# Altium PCB btretro_pcb.PcbDoc (part 1 of 2)
Units mm, origin at the board's own origin, x right, y up, seen from the top; angles counter-clockwise.
Board outline 100 x 100 mm, 2 copper layers (Top Layer, Bottom Layer); 79 components, 68 nets, 387 pads, 70 vias.
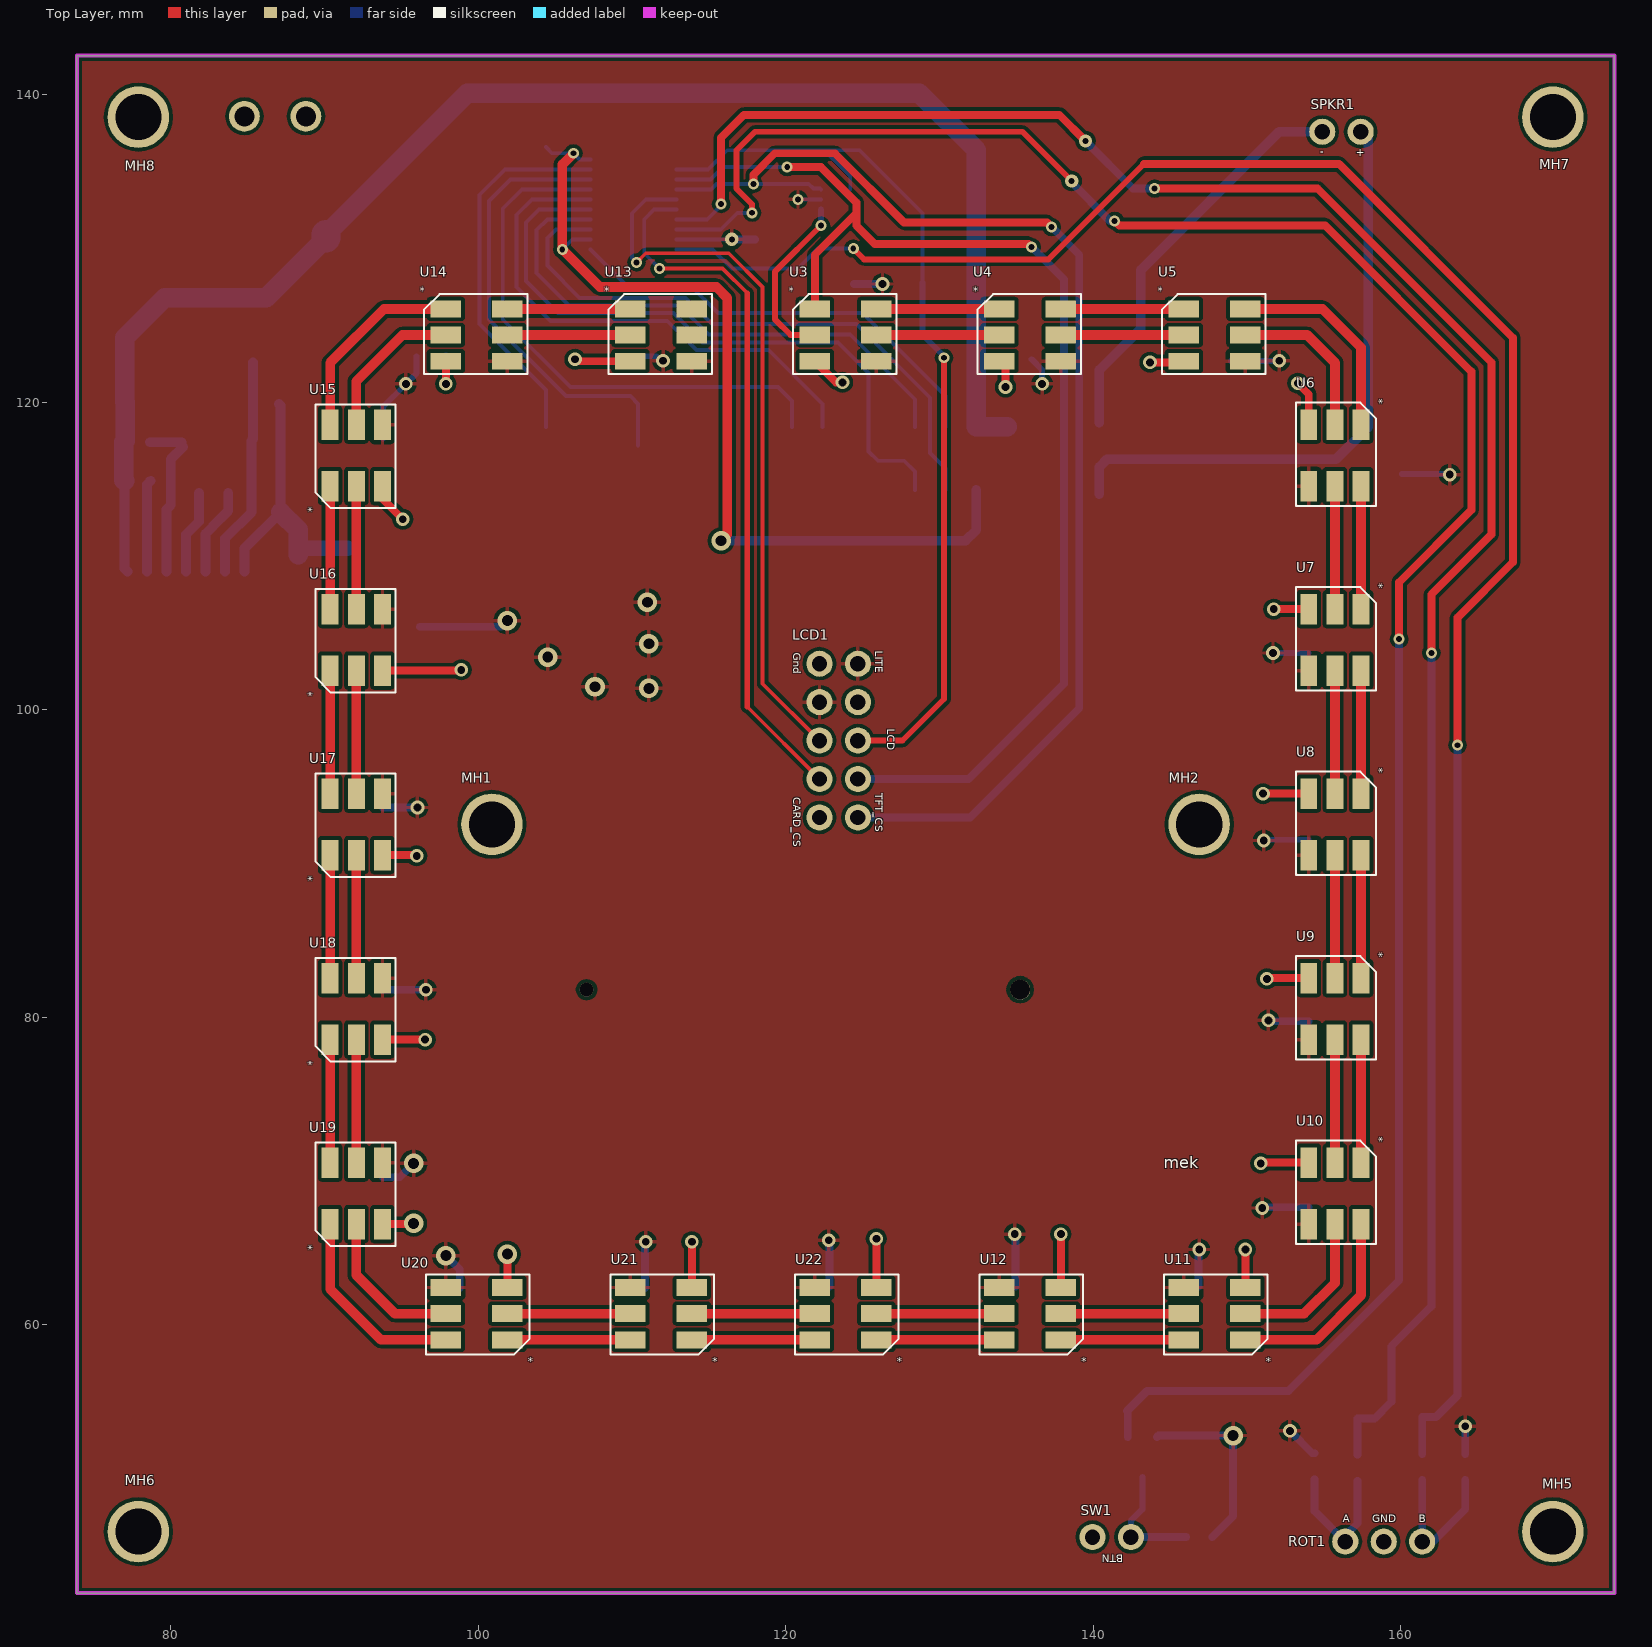
[diagram p0: Top Layer view]
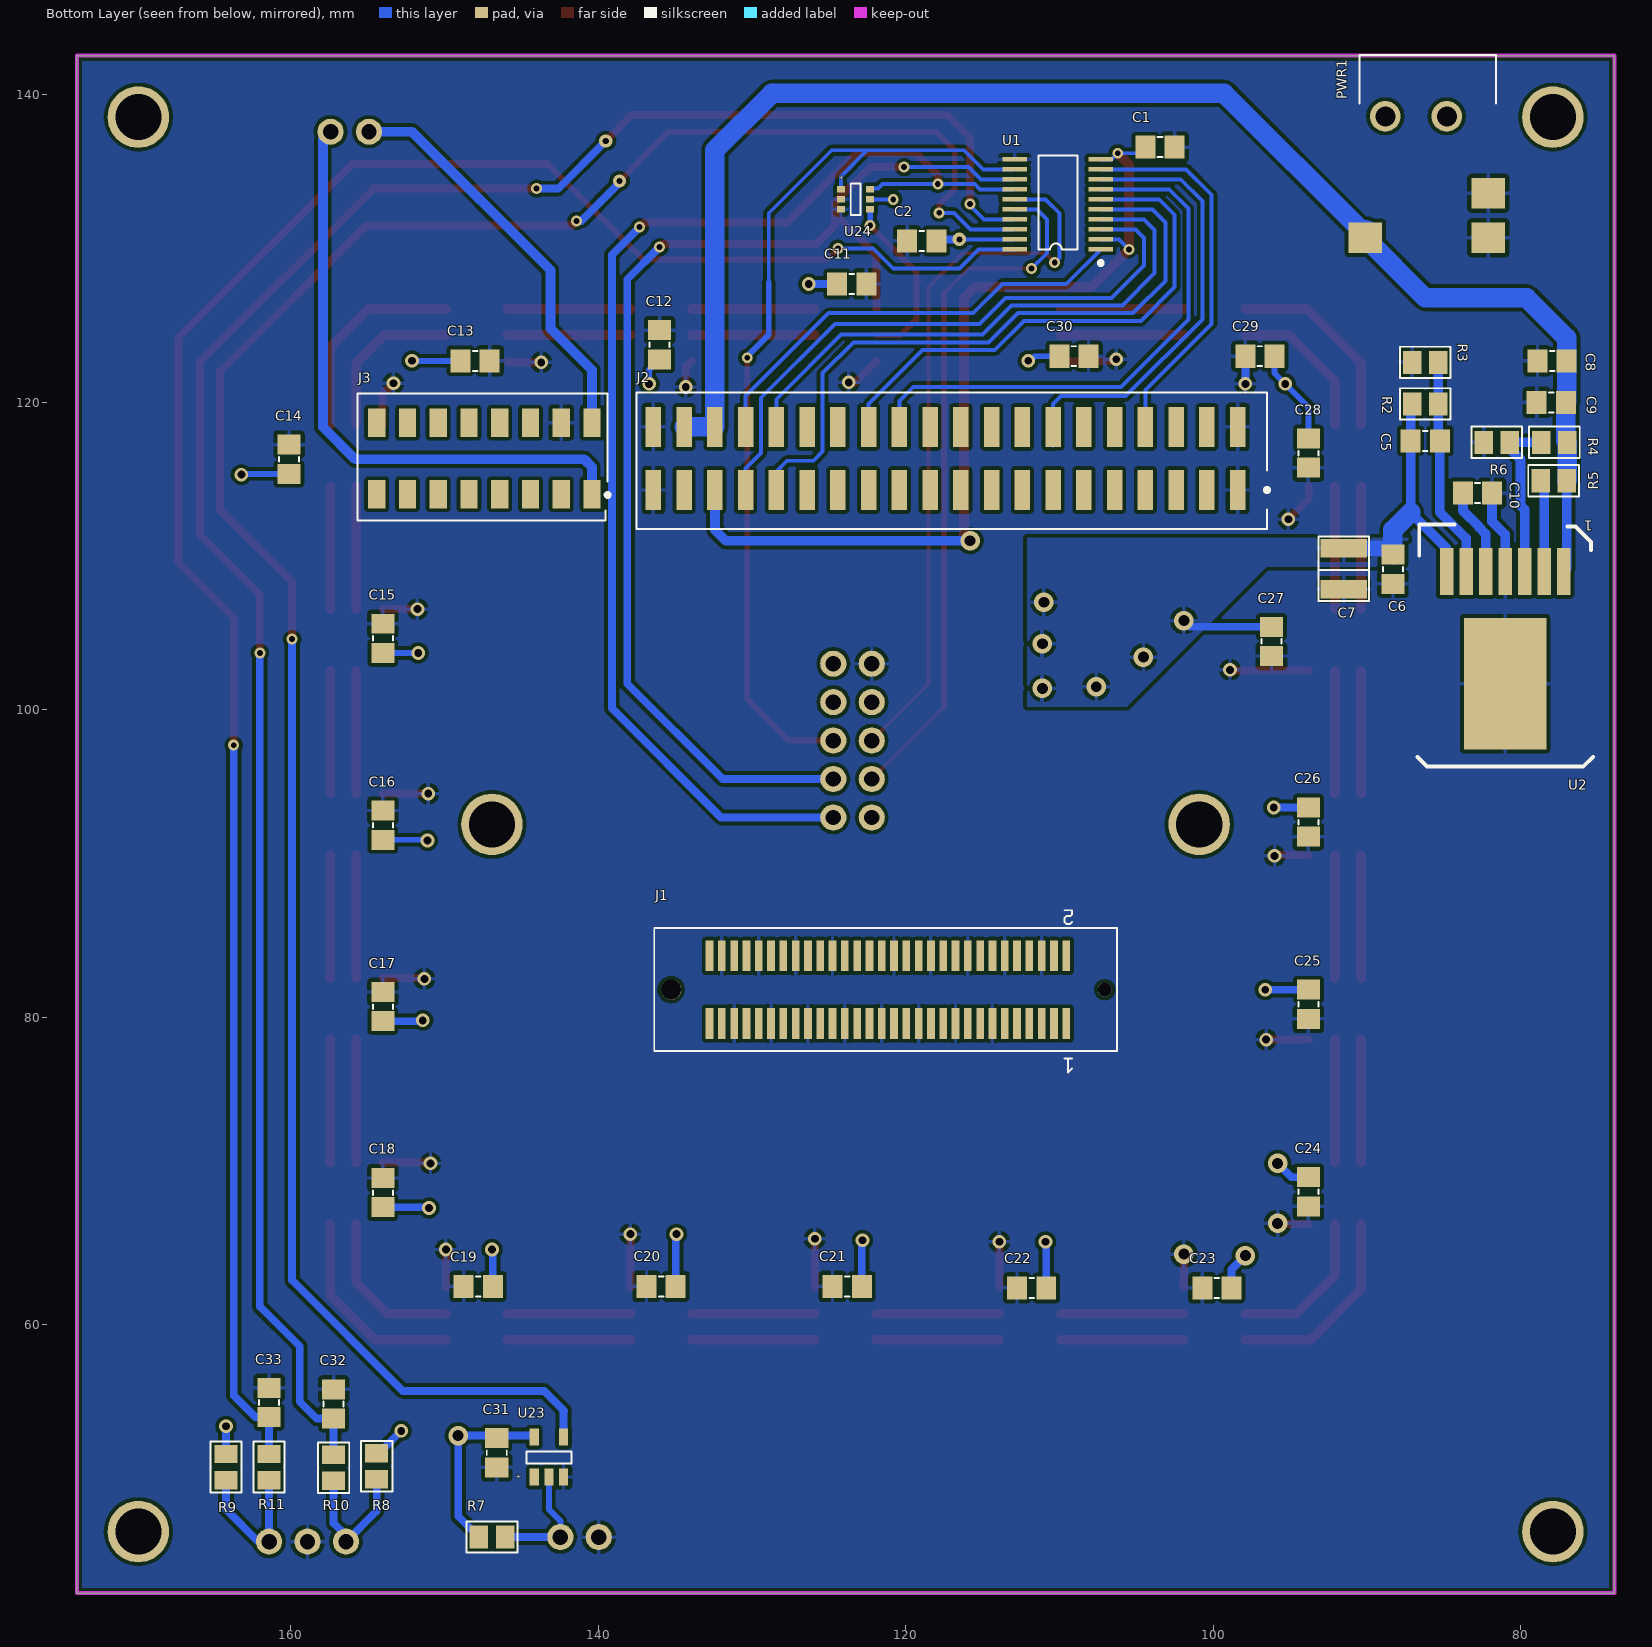
[diagram p1: Bottom Layer view, seen from below]

## Layer stack, top to bottom
Top Solder: solder mask 0.0102, Solder Resist, Dk 3.5
Top Layer: signal copper 0.0356
Dielectric 1: dielectric 0.32, FR-4, Dk 4.8
Bottom Layer: signal copper 0.0356
Bottom Solder: solder mask 0.0102, Solder Resist, Dk 3.5

## Board outline
73.9,42.55 73.9,142.55 173.9,142.55 173.9,42.55

## Design rules (kind name [scope] priority, off if disabled: settings)
Clearance [All] p1: gap=0.229 ignorepadtopadclearanceinfootprint=FALSE except(0: Arc-Hole Track-Hole)
HoleSize [All] p1: absolutevalues=TRUE maxlimit=4 minlimit=0.025 maxpercent=80.000 minpercent=20.000
MinimumAnnularRing [All] p1: minimumring=0.152
MinimumSolderMaskSliver [All] p1 off: minsoldermaskwidth=0.254
PolygonConnect [All] p1: connectstyle=Relief reliefconductorwidth=0.254 reliefentries=4 polygonreliefangle="90 Angle" airgapwidth=0.254
RoutingVias [All] p1: holewidth=0.711 width=1.27 viastyle="Through Hole" minholewidth=0.254 minwidth=0.254 maxholewidth=1.27 maxwidth=2.54
SilkToSolderMaskClearance [IsPad] p1 off: minsilkscreentomaskgap=0.051 clearancetoexposedcopper=TRUE
SolderMaskExpansion [All] p1: expansion=0.102
Width [All] p1: maxlimit=2.54 minlimit=0.127 preferedwidth=0.254
27 further rules are at their usual default settings.

## Components (designator, comment, footprint, x,y, rotation, side; value= is the part's Value field where it differs from the comment)
C1 "CAP_0805_.1u_250V" CAPC2012X135N 103.45,136.6 r180 bottom value=.1uF
C2 "CAP_0805_.1u_250V" CAPC2012X135N 118.95,130.5 r180 bottom value=.1uF
C5 "CAP_0805_m22n" CAPC2012X135N 86.2,117.5 r0 bottom value=22nF
C6 "CAP_0805_10u_16V" CAPC2012X135N 88.3,109.15 r90 bottom value=10uF
C7 "CAP_1210_100u_10V" FP_1210 91.5,107.833 r90 bottom value=100uF
C8 "CAP_0805_1u_100V" CAPC2012X135N 77.95,122.7 r180 bottom value=1uF
C9 "CAP_0805_22u_25V" CAPC2012X135N 78,120 r180 bottom value=22uF
C10 "CAP_0805_m22n" CAPC2012X135N 82.8,114.1 r0 bottom value=22nF
C11 "CAP_0805_.1u_250V" CAPC2012X135N 123.5,127.7 r0 bottom value=.1uF
C12 "CAP_0805_.1u_250V" CAPC2012X135N 136,123.75 r270 bottom value=.1uF
C13 "CAP_0805_.1u_250V" CAPC2012X135N 148,122.7 r0 bottom value=.1uF
C14 "CAP_0805_.1u_250V" CAPC2012X135N 160.1,116.3 r270 bottom value=.1uF
C15 "CAP_0805_.1u_250V" CAPC2012X135N 154,104.65 r270 bottom value=.1uF
C16 "CAP_0805_.1u_250V" CAPC2012X135N 154,92.5 r270 bottom value=.1uF
C17 "CAP_0805_.1u_250V" CAPC2012X135N 154,80.7 r270 bottom value=.1uF
C18 "CAP_0805_.1u_250V" CAPC2012X135N 154,68.6 r270 bottom value=.1uF
C19 "CAP_0805_.1u_250V" CAPC2012X135N 147.8,62.5 r180 bottom value=.1uF
C20 "CAP_0805_.1u_250V" CAPC2012X135N 135.9,62.5 r180 bottom value=.1uF
C21 "CAP_0805_.1u_250V" CAPC2012X135N 123.8,62.5 r180 bottom value=.1uF
C22 "CAP_0805_.1u_250V" CAPC2012X135N 111.8,62.4 r180 bottom value=.1uF
C23 "CAP_0805_.1u_250V" CAPC2012X135N 99.75,62.4 r180 bottom value=.1uF
C24 "CAP_0805_.1u_250V" CAPC2012X135N 93.8,68.65 r90 bottom value=.1uF
C25 "CAP_0805_.1u_250V" CAPC2012X135N 93.8,80.85 r90 bottom value=.1uF
C26 "CAP_0805_.1u_250V" CAPC2012X135N 93.8,92.7 r90 bottom value=.1uF
C27 "CAP_0805_.1u_250V" CAPC2012X135N 96.2,104.45 r90 bottom value=.1uF
C28 "CAP_0805_.1u_250V" CAPC2012X135N 93.8,116.7 r90 bottom value=.1uF
C29 "CAP_0805_.1u_250V" CAPC2012X135N 96.95,123 r180 bottom value=.1uF
C30 "CAP_0805_.1u_250V" CAPC2012X135N 109.05,123 r0 bottom value=.1uF
C31 "CAP_0805_.1u_250V" CAPC2012X135N 146.591,51.677 r90 bottom value=.1uF
C32 "CAP_0805_10n_250V" CAPC2012X135N 157.2,54.85 r270 bottom
C33 "CAP_0805_10n_250V" CAPC2012X135N 161.4,54.95 r270 bottom
J1 "DragonBoard_HIGH_SPEED" DB_HIGH_SPEED 109.55,79.6 r0 bottom locked
J2 "DragonBoard_LOW_SPEED" 57202_40_PIN_HEADER 98.4,114.3 r180 bottom locked
J3 "DragonBoard_ANALOG" 16_PIN_ANALOG_CONN 140.4,118.675 r0 bottom locked
LCD1 "Display" LCD_HOLES 124.7,98 r270 top
MH1 "MOUNTHOLES" HOLE_BTRETRO 100.9,92.55 r0 top
MH2 "MOUNTHOLES" HOLE_BTRETRO 146.9,92.55 r0 top
MH5 "MOUNTHOLES" HOLE_BTRETRO 169.9,46.55 r0 top
MH6 "MOUNTHOLES" HOLE_BTRETRO 77.9,46.55 r0 top
MH7 "MOUNTHOLES" HOLE_BTRETRO 169.9,138.55 r0 top
MH8 "MOUNTHOLES" HOLE_BTRETRO 77.9,138.55 r0 top
PWR1 "EIAJ3" "EIAJ3 BARREL" 87.3,142.6 r270 bottom
R2 "RES_5.23K" RES0805 86.2,119.9 r0 bottom
R3 "RES_0805_1K" RES0805 86.2,122.6 r0 bottom
R4 "RES_0805_23.2K" RES0805 77.8,117.4 r180 bottom
R5 "RES_0805_100K" RES0805 77.85,114.9 r0 bottom
R6 "RES_0805_11.8K" RES0805 81.55,117.4 r180 bottom
R7 "RES_0805_10K" RES0805 146.9,46.2 r0 bottom
R8 "RES_0805_10K" RES0805 154.4,50.8 r90 bottom
R9 "RES_0805_10K" RES0805 164.2,50.75 r90 bottom
R10 "RES_0805_10K" RES0805 157.2,50.7 r270 bottom
R11 "RES_0805_10K" RES0805 161.4,50.75 r270 bottom
ROT1 "ROT_ENCODER" ROTENCFP 158.9,45.9 r0 top
SPKR1 "CDS-27204-L100" SPK_BTRETRO 157.4,137.6 r180 top
SW1 "BUTTON" BUTTON 142.455,46.194 r180 top
U1 "TXS0108" TSSOP20 107.3,129.95 r0 bottom
U2 "LMZ12003" TO-PMOD-7 81,109.005 r0 bottom
U3 "APA102c" LED_APA 123.9,124.375 r0 top
U4 "APA102c" LED_APA 135.9,124.375 r0 top
U5 "APA102c" LED_APA 147.9,124.375 r0 top
U6 "APA102c" LED_APA 155.725,116.55 r270 top
U7 "APA102c" LED_APA 155.725,104.55 r270 top
U8 "APA102c" LED_APA 155.725,92.55 r270 top
U9 "APA102c" LED_APA 155.725,80.55 r270 top
U10 "APA102c" LED_APA 155.725,68.55 r270 top
U11 "APA102c" LED_APA 147.9,60.725 r180 top
U12 "APA102c" LED_APA 135.9,60.725 r180 top
U13 "APA102c" LED_APA 111.9,124.375 r0 top
U14 "APA102c" LED_APA 99.9,124.375 r0 top
U15 "APA102c" LED_APA 92.075,116.55 r90 top
U16 "APA102c" LED_APA 92.075,104.55 r90 top
U17 "APA102c" LED_APA 92.075,92.55 r90 top
U18 "APA102c" LED_APA 92.075,80.55 r90 top
U19 "APA102c" LED_APA 92.075,68.55 r90 top
U20 "APA102c" LED_APA 99.9,60.725 r180 top
U21 "APA102c" LED_APA 111.9,60.725 r180 top
U22 "APA102c" LED_APA 123.9,60.725 r180 top
U23 "SN74LVC1G17" "DBV0005A (SOT-23)" 144.15,50.1 r90 bottom
U24 "NC7SZ167" SC70 124.2,133.85 r180 bottom

## Footprints (in the part's own frame and the unit in brackets; to place one, negate y for a bottom-side part, rotate by r counter-clockwise, add the part's x,y. Pads: shape width x height; smd on the part's side, far side on the other; paste and mask are expansions set on the pad)
16_PIN_ANALOG_CONN [mm]
  rect 1.12x1.83 smd: 1(0,4.65) 2(0,0) 3(2,4.65) 4(2,0) 5(4,4.65) 6(4,0) 7(6,4.65) 8(6,0) 9(8,4.65) 10(8,0) 11(10,4.65) 12(10,0) 13(12,4.65) 14(12,0) 15(14,4.65) 16(14,0)
  silkscreen extent -1.14,-1.91 15.24,6.35
57202_40_PIN_HEADER [mm]
  rect 1x2.6 smd: 1(0,0) 2(0,4.1) 3(-2,0) 4(-2,4.1) 5(-4,0) 6(-4,4.1) 7(-6,0) 8(-6,4.1) 9(-8,0) 10(-8,4.1) 11(-10,0) 12(-10,4.1) 13(-12,0) 14(-12,4.1) 15(-14,0) 16(-14,4.1) 17(-16,0) 18(-16,4.1) 19(-18,0) 20(-18,4.1) 21(-20,0) 22(-20,4.1) 23(-22,0) 24(-22,4.1) 25(-24,0) 26(-24,4.1) 27(-26,0) 28(-26,4.1) 29(-28,0) 30(-28,4.1) 31(-30,0) 32(-30,4.1) 33(-32,0) 34(-32,4.1) 35(-34,0) 36(-34,4.1) 37(-36,0) 38(-36,4.1) 39(-38,0) 40(-38,4.1)
  silkscreen extent -39.12,-2.54 2.03,6.35
BUTTON [mm]
  round 1.7 hole 1: 1(0,0) 2(2.5,0)
CAPC2012X135N [mm]
  rect 1.3x1.5 smd: 1(-0.95,0) 2(0.95,0)
  silkscreen extent -0.15,-0.65 0.15,0.65
DB_HIGH_SPEED [mm]
  rect 0.5x2 smd: 1(0,0) 2(0,-4.4) 3(0.8,0) 4(0.8,-4.4) 5(1.6,0) 6(1.6,-4.4) 7(2.4,0) 8(2.4,-4.4) 9(3.2,0) 10(3.2,-4.4) 11(4,0) 12(4,-4.4) 13(4.8,0) 14(4.8,-4.4) 15(5.6,0) 16(5.6,-4.4) 17(6.4,0) 18(6.4,-4.4) 19(7.2,0) 20(7.2,-4.4) 21(8,0) 22(8,-4.4) 23(8.8,0) 24(8.8,-4.4) 25(9.6,0) 26(9.6,-4.4) 27(10.4,0) 28(10.4,-4.4) 29(11.2,0) 30(11.2,-4.4) 31(12,0) 32(12,-4.4) 33(12.8,0) 34(12.8,-4.4) 35(13.6,0) 36(13.6,-4.4) 37(14.4,0) 38(14.4,-4.4) 39(15.2,0) 40(15.2,-4.4) 41(16,0) 42(16,-4.4) 43(16.8,0) 44(16.8,-4.4) 45(17.6,0) 46(17.6,-4.4) 47(18.4,0) 48(18.4,-4.4) 49(19.2,0) 50(19.2,-4.4) 51(20,0) 52(20,-4.4) 53(20.8,0) 54(20.8,-4.4) 55(21.6,0) 56(21.6,-4.4) 57(22.4,0) 58(22.4,-4.4) 59(23.2,0) 60(23.2,-4.4)
  round 0.9 hole 0.9 unplated: MH1(-2.5,-2.2)
  round 1.3 hole 1.3 unplated: MH2(25.7,-2.2)
  silkscreen extent -3.3,-7.37 26.8,3.17
"DBV0005A (SOT-23)" [mm]
  rect 1.1x0.6 smd: 1(0,0) 2(0,-0.95) 3(0,-1.9) 4(2.6,-1.9) 5(2.6,0)
  silkscreen extent 0.89,-2.41 1.65,0.51
"EIAJ3 BARREL" [mm]
  rect 2x2.2 smd: 1(11.9,-2.8) 2(9,5.2) 3(11.9,5.2)
  round 2 hole 1.3 unplated: MH1(4,2.5) MH2(4,-1.5)
  silkscreen extent 0,-3.18 3.18,5.71
FP_1210 [mm]
  rect 1.2x3 smd: 1(0,0) 2(2.667,0)
  silkscreen extent -0.76,-1.65 3.43,1.65
HOLE_BTRETRO [mm]
  round 4 hole 3 unplated: MH(0,0)
LCD_HOLES [mm]
  round 1.7 hole 1: 1(-5,0) 2(-2.5,0) 3(0,0) 4(2.5,0) 5(5,0) 6(5,-2.5) 7(2.5,-2.5) 8(0,-2.5) 9(-2.5,-2.5) 10(-5,-2.5)
LED_APA [mm]
  rect 2x1.1 smd: 1(-2,1.7) 2(-2,0) 3(-2,-1.7) 4(2,-1.7) 5(2,0) 6(2,1.7)
  silkscreen extent -3.43,-2.54 3.3,2.67
RES0805 [mm]
  rect 1.2x1.5 smd: 1(-0.85,0) 2(0.85,0)
  silkscreen extent -1.65,-1.02 1.65,1.02
ROTENCFP [mm]
  round 1.7 hole 1: 1(-2.5,0) 2(0,0) 3(2.5,0)
SC70 [mm]
  rect 0.52x0.42 smd: 1(0,0) 2(0,-0.65) 3(0,-1.3) 4(1.9,-1.3) 5(1.9,-0.65) 6(1.9,0)
  silkscreen extent 0.63,-1.65 1.27,0.38
SPK_BTRETRO [mm]
  round 1.7 hole 1: 1(0,0) 2(2.5,0)
TO-PMOD-7 [mm]
  rect 0.89x3.06 smd: 1(-3.81,0) 2(-2.54,0) 3(-1.27,0) 4(0,0) 5(1.27,0) 6(2.54,0) 7(3.81,0)
  rect 5.35x8.54 smd: 8(0,7.305)
  silkscreen extent -5.71,-3.05 5.71,12.7
TSSOP20 [mm]
  rect 1.6x0.3 smd: 1(0,0) 2(0,-0.65) 3(0,-1.3) 4(0,-1.95) 5(0,-2.6) 6(0,-3.25) 7(0,-3.9) 8(0,-4.55) 9(0,-5.2) 10(0,-5.85) 11(5.6,-5.85) 12(5.6,-5.2) 13(5.6,-4.55) 14(5.6,-3.9) 15(5.6,-3.25) 16(5.6,-2.6) 17(5.6,-1.95) 18(5.6,-1.3) 19(5.6,-0.65) 20(5.6,0)
  silkscreen extent -0.13,-6.1 4.06,1.02

## Part data
C1 C2 C11 C12 C13 C14 C15 C16 C17 C18 C19 C20 C21 C22 C23 C24 C25 C26 C27 C28 C29 C30 C31: "Cap Ceramic 0.1uF 250V X7T 10% SMD 0805 125C Plastic T/R", Capacitance=100nF, Case/Package=0805, Case Code (Metric)=2012, Dielectric=X7T, Manufacturer=TDK, Manufacturer Part Number=C2012X7T2E104K125AE, Max Operating Temperature=125°C, Min Operating Temperature=-55°C, Package Quantity=1, Supplier Part Number 1=445-8883-1-ND, Tolerance=10%, Voltage Rating=250V, Case Code (Imperial)=0805, ComponentLink1Description=https://datasheet.ciiva.com/24219/c2012x7t2e104k125ae-265154-24219519.pdf, ComponentLink1URL=https://datasheet.ciiva.com/24219/c2012x7t2e104k125ae-265154-24219519.pdf, Composition=Ceramic, Depth=1.25mm, Height=1.25mm, Length=2mm, Packaging="Tape and Reel", Pricing 1="1=0.37, 10=0.25, 100=0.1419, 500=0.1002, 1000=0.0877 (USD)", REACH SVHC="No SVHC", Stock 1=30376, Supplier 1=Digi-Key, Termination=SMD/SMT, Thickness=0.049inch, Voltage Rating (DC)=250V, Weight=0.000194oz, Width=0.05inch
C5 C10: library part CAP_0805_22n_100V, "CAP CER 0.022UF 100V X7R 0805", Capacitance=22nF, Case/Package=0805, Case Code (Metric)=2012, Dielectric=X7R, Manufacturer=TDK, Manufacturer Part Number=CGJ4J2X7R2A223K125AA, Max Operating Temperature=125°C, Min Operating Temperature=-55°C, Package Quantity=1, Supplier Part Number 1=445-9184-1-ND, Tolerance=10%, Voltage Rating=100V, Case Code (Imperial)=0805, ComponentLink1Description=http://www.mouser.com/ds/2/400/lcc_highreliability_midvoltage_en-520194.pdf, ComponentLink1URL=http://www.mouser.com/ds/2/400/lcc_highreliability_midvoltage_en-520194.pdf, ComponentLink2Description=http://product.tdk.com/capacitor/mlcc/en/documents/mlccspec_highreliability_en.pdf, ComponentLink2URL=http://product.tdk.com/capacitor/mlcc/en/documents/mlccspec_highreliability_en.pdf, Composition=Ceramic, Height=1.25mm, Length=0.08inch, Packaging="Tape and Reel", Pricing 1="1=0.42, 10=0.292, 100=0.175, 500=0.1312, 1000=0.1108 (USD)", Stock 1=2508, Supplier 1=Digi-Key, Termination=SMD/SMT, Thickness=0.057inch, Voltage Rating (DC)=100V, Weight=0.000194oz, Width=0.05inch
C6: "Cap Ceramic 10uF 16V X5R 10% SMD 0805 85C T/R", Capacitance=10uF, Case/Package=0805, Case Code (Metric)=2012, Dielectric=X5R, Manufacturer="Johanson Dielectrics", Manufacturer Part Number=160R15X106KV4E, Max Operating Temperature=85°C, Min Operating Temperature=-55°C, Package Quantity=2000, Supplier Part Number 1=709-1229-1-ND, Tolerance=10%, Voltage Rating=16V, Case Code (Imperial)=0805, ComponentLink1Description=https://datasheet.ciiva.com/26948/getdatasheetpartid-132904-26948555.pdf, ComponentLink1URL=https://datasheet.ciiva.com/26948/getdatasheetpartid-132904-26948555.pdf, Depth=1.27mm, Height=1.27mm, Length=2.03mm, Mount="Surface Mount", Number of Pins=2, Packaging="Tape and Reel", Pricing 1="1=0.55, 10=0.387, 100=0.2552, 500=0.189, 1000=0.1607 (USD)", Radiation Hardening=No, REACH SVHC="No SVHC", Stock 1=36636, Supplier 1=Digi-Key, Termination=SMD/SMT, Thickness=0.06inch, Voltage Rating (DC)=16V, Weight=0.000194oz, Width=1.27mm
C7: "Cap Ceramic 100uF 10V X5R 20% SMD 1210 85C Embossed T/R", Capacitance=100uF, Case/Package=1210, Case Code (Metric)=3225, Dielectric=X5R, Dielectric Material=Ceramic, Manufacturer=Murata, Manufacturer Part Number=GRM32ER61A107ME20L, Max Operating Temperature=85°C, Min Operating Temperature=-55°C, Package Quantity=1000, Supplier Part Number 1=490-9969-1-ND, Tolerance=20%, Voltage=10V, Case Code (Imperial)=1210, ComponentLink1Description=http://components.arrow.com/part/dataview/0323_06932945, ComponentLink1URL=http://components.arrow.com/part/dataview/0323_06932945, ComponentLink2Description=http://www.mouser.com/ds/2/281/c02e-2905.pdf, ComponentLink2URL=http://www.mouser.com/ds/2/281/c02e-2905.pdf, ComponentLink3Description=http://www.farnell.com/datasheets/2079200.pdf, ComponentLink3URL=http://www.farnell.com/datasheets/2079200.pdf, ComponentLink4Description=http://psearch.en.murata.com/capacitor/product/GRM32ER61A107ME20%23.pdf, ComponentLink4URL=http://psearch.en.murata.com/capacitor/product/GRM32ER61A107ME20%23.pdf, Depth=2.5mm, Dissipation Factor=0.035%, Height=2.5mm, Lead Free="Lead Free", Length=3.2mm, Material=Ceramic, Packaging="Tape and Reel", Pricing 1="1=1.08, 10=0.822, 100=0.5882, 500=0.4554 (USD)", REACH SVHC="No SVHC", Stock 1=195702, Supplier 1=Digi-Key, Termination=SMD/SMT, Thickness=0.106inch, Voltage Rating=10V, Voltage Rating (DC)=10V, Weight=0.00388oz, Width=2.5mm
C8: "CAP CER 1UF 100V X7S 0805", Capacitance=1uF, Case/Package=0805, Case Code (Metric)=2012, Dielectric=X7S, Manufacturer=TDK, Manufacturer Part Number=C2012X7S2A105K125AE, Max Operating Temperature=125°C, Min Operating Temperature=-55°C, Package Quantity=1, Supplier Part Number 1=445-8887-1-ND, Tolerance=10%, Voltage Rating=100V, Case Code (Imperial)=0805, ComponentLink1Description=https://datasheet.ciiva.com/6252/mlcc-commercial-soft-en-6252535.pdf, ComponentLink1URL=https://datasheet.ciiva.com/6252/mlcc-commercial-soft-en-6252535.pdf, ComponentLink2Description=https://datasheet.ciiva.com/6252/mlcc-commercial-soft-en-6252538.pdf, ComponentLink2URL=https://datasheet.ciiva.com/6252/mlcc-commercial-soft-en-6252538.pdf, ComponentLink3Description=https://datasheet.ciiva.com/6252/mlcc-commercial-soft-en-6252540.pdf, ComponentLink3URL=https://datasheet.ciiva.com/6252/mlcc-commercial-soft-en-6252540.pdf, ComponentLink4Description=https://datasheet.ciiva.com/24219/c2012x7s2a105k125ae-265181-24219982.pdf, ComponentLink4URL=https://datasheet.ciiva.com/24219/c2012x7s2a105k125ae-265181-24219982.pdf, Composition=Ceramic, Depth=1.25mm, Height=1.25mm, Lead Free="Lead Free", Length=2mm, Packaging="Tape and Reel", Pricing 1="1=0.46, 10=0.327, 100=0.2152, 500=0.1594, 1000=0.1355 (USD)", Stock 1=75778, Supplier 1=Digi-Key, Termination=SMD/SMT, Thickness=0.049inch, Voltage Rating (DC)=100V, Width=0.05inch
C9: "22µF ±20% 25V X5R Ceramic Capacitor -55°C ~ 85°C Surface Mount, MLCC 0805 (2012 Metric) 0.079\" L x 0.049\" W (2.00mm x 1.25mm)", Capacitance=22uF, Case/Package=0805, Case Code (Metric)=2012, Dielectric=X5R, Manufacturer=Samsung, Manufacturer Part Number=CL21A226MAQNNNE, Max Operating Temperature=85°C, Min Operating Temperature=-55°C, Package Quantity=1, Supplier Part Number 1=1276-2908-1-ND, Tolerance=20%, Voltage Rating=25V, Case Code (Imperial)=0805, ComponentLink1Description=https://datasheet.ciiva.com/25724/cl21a226maqnnne-25724468.pdf, ComponentLink1URL=https://datasheet.ciiva.com/25724/cl21a226maqnnne-25724468.pdf, Contact Plating=Nickel,Tin, Depth=1.25mm, Length=2mm, Mount="Surface Mount", Packaging="Tape and Reel", Pricing 1="1=0.92, 10=0.678, 100=0.465, 500=0.3681, 1000=0.31 (USD)", Stock 1=536403, Supplier 1=Digi-Key, Termination=Wraparound, Thickness=0.055inch, Width=0.049inch
C32 C33: "Cap Ceramic 0.1uF 250V X7T 10% SMD 0805 125C Plastic T/R", Capacitance=10nF, Case/Package=0805, Case Code (Metric)=2012, Dielectric=X7R, Manufacturer=TDK, Manufacturer Part Number=C2012X7R2E103K125AA, Max Operating Temperature=125°C, Min Operating Temperature=-55°C, Package Quantity=1, Supplier Part Number 1=445-2280-1-ND, Tolerance=10%, Voltage Rating=250V, Case Code (Imperial)=0805, ComponentLink1Description=https://datasheet.ciiva.com/24219/c2012x7r2e103k125aa-265098-24219253.pdf, ComponentLink1URL=https://datasheet.ciiva.com/24219/c2012x7r2e103k125aa-265098-24219253.pdf, ComponentLink2Description=https://datasheet.ciiva.com/22684/1484596-22684119.pdf, ComponentLink2URL=https://datasheet.ciiva.com/22684/1484596-22684119.pdf, ComponentLink3Description=https://datasheet.ciiva.com/7975/1833281-7975113.pdf, ComponentLink3URL=https://datasheet.ciiva.com/7975/1833281-7975113.pdf, ComponentLink4Description=https://datasheet.ciiva.com/28602/1484596-28602284.pdf, ComponentLink4URL=https://datasheet.ciiva.com/28602/1484596-28602284.pdf, ComponentLink5Description=https://datasheet.ciiva.com/16427/e412-c-16427789.pdf, ComponentLink5URL=https://datasheet.ciiva.com/16427/e412-c-16427789.pdf, Composition=Ceramic, Depth=1.25mm, Height=1.25mm, Lead Free="Lead Free", Length=2mm, Mount="Surface Mount", Number of Pins=2, Packaging="Tape and Reel", Pricing 1="1=0.19, 10=0.135, 100=0.0633, 500=0.0444, 1000=0.0367 (USD)", REACH SVHC="No SVHC", Stock 1=156464, Supplier 1=Digi-Key, Termination=SMD/SMT, Thickness=0.053inch, Voltage Rating (DC)=250V, Weight=0.000194oz, Width=0.049inch
J1: "60 Position Connector Plug, Center Strip Contacts Surface Mount Gold", Case/Package=SMD/SMT, Contact Resistance=50mR, Current Rating=500mA, Flammability Rating="UL94 V-0", Manufacturer="Amphenol FCI", Manufacturer Part Number=61083-064402LF, Max Operating Temperature=125°C, Max Voltage Rating (AC)=100V, Min Operating Temperature=-40°C, Package Quantity=600, Supplier Part Number 1=609-1681-1-ND, ComponentLink1Description=https://datasheet.ciiva.com/15208/getdatasheetpartid-64898-15208309.pdf, ComponentLink1URL=https://datasheet.ciiva.com/15208/getdatasheetpartid-64898-15208309.pdf, ComponentLink2Description=https://datasheet.ciiva.com/17088/70248518-17088294.pdf, ComponentLink2URL=https://datasheet.ciiva.com/17088/70248518-17088294.pdf, ComponentLink3Description=https://datasheet.ciiva.com/394/61083-394311.pdf, ComponentLink3URL=https://datasheet.ciiva.com/394/61083-394311.pdf, ComponentLink4Description=https://datasheet.ciiva.com/5129/61083-5129495.pdf, ComponentLink4URL=https://datasheet.ciiva.com/5129/61083-5129495.pdf, ComponentLink5Description=https://datasheet.ciiva.com/10034/61083-10034439.pdf, ComponentLink5URL=https://datasheet.ciiva.com/10034/61083-10034439.pdf, ComponentLink6Description=https://datasheet.ciiva.com/394/61083-394312.pdf, ComponentLink6URL=https://datasheet.ciiva.com/394/61083-394312.pdf, ComponentLink7Description=https://datasheet.ciiva.com/394/61083-394313.pdf, ComponentLink7URL=https://datasheet.ciiva.com/394/61083-394313.pdf, Connector Type=Plug, Contact Material="Brass,Copper Alloy", Contact Plating=Nickel,Gold, Depth=6mm, Gender=Male, Housing Material=Polymer, Lead Free="Lead Free", Length=29.8mm, Mount="Surface Mount", Number of Contacts=60, Number of Positions=60, Number of Rows=2, Orientation=Straight, Packaging="Tape and Reel", Pitch=0.8mm, Pricing 1="1=6.36, 10=6.094, 25=5.5644, 50=5.2994, 100=5.0344, 250=4.5044 (USD)", Stack Height=7.7mm, Stock 1=579, Supplier 1=Digi-Key, Termination=Solder, Voltage Rating=100V, Width=6mm
J2: "40 Positions Header, Unshrouded Connector 0.079\" (2.00mm) Surface Mount Gold, GXT™", Colour=Black, Contact Resistance=25mR, Current Rating=2A, Insulation Resistance=1GR, Manufacturer="Amphenol FCI", Manufacturer Part Number=57202-G52-20LF, Max Operating Temperature=125°C, Max Voltage Rating (AC)=650V, Min Operating Temperature=-55°C, Package Quantity=100, Supplier Part Number 1=609-2632-ND, ComponentLink1Description=https://datasheet.ciiva.com/9473/57202-9473862.pdf, ComponentLink1URL=https://datasheet.ciiva.com/9473/57202-9473862.pdf, ComponentLink2Description=https://datasheet.ciiva.com/711/57202-711726.pdf, ComponentLink2URL=https://datasheet.ciiva.com/711/57202-711726.pdf, Connector Type="Male Pin", Contact Gender=Male, Contact Material="Bronze,Copper Alloy", Contact Mating Length=0.157inch, Contact Plating=Nickel,Gold,GXT, Depth=4mm, Gender=Male, Housing Colour=Black, Housing Material=Thermoplastic, Lead Free="Lead Free", Length=40mm, Mating Post Length=4mm, Mount="Surface Mount", Number of Contacts=40, Number of Positions=40, Number of Rows=2, Orientation=Straight, Packaging=Bulk, Pitch=2mm, Pricing 1="1=4.58, 10=4.395, 100=3.6624, 500=3.113, 1000=2.6552 (USD)", Radiation Hardening=No, REACH SVHC="No SVHC", Row Spacing=0.079inch, Stock 1=3189, Supplier 1=Digi-Key, Termination=Solder, Voltage Rating=650V, Width=4mm
J3: "Conn Socket Strip RCP 16 POS 2mm Solder ST SMD Tube", Case/Package=SMD/SMT, Colour=Black, Contact Resistance=25mR, Manufacturer=Molex, Manufacturer Part Number=0791091007, Max Operating Temperature=105°C, Max Voltage Rating (AC)=125V, Min Operating Temperature=-55°C, Supplier Part Number 1=WM18703-ND, ComponentLink1Description=https://datasheet.ciiva.com/10078/0791091007-pcb-receptacles-10078749.pdf, ComponentLink1URL=https://datasheet.ciiva.com/10078/0791091007-pcb-receptacles-10078749.pdf, Connector Type=Receptacle,Socket, Contact Material=Bronze, Contact Plating=Nickel,Gold, Depth=4.19mm, Gender=Female, Housing Colour=Black, Housing Material=Polymer, Length=16.19mm, Number of Contacts=16, Number of Positions=16, Number of Rows=2, Orientation=Straight, Packaging=Rail/Tube, Pitch=2mm, Pricing 1="1=2.66, 10=2.554, 100=2.1284, 500=1.8091, 1000=1.5431, 5000=1.3835 (USD)", Row Spacing=0.079inch, Stock 1=8937, Supplier 1=Digi-Key, Termination=Solder
LCD1: library part LCD_SCREEN_BTRETRO, "TFT Display"
MH1 MH2 MH5 MH6 MH7 MH8: "HOLE"
PWR1: "PJ1-021 Series 1.65 mm x 5.15 mm 16 V Right Angle SMT Power Jack", Case/Package=SMD/SMT, Colour=Black, Current Rating=5A, Flammability Rating="UL94 V-0", Insulation Resistance=100MR, Manufacturer=CUI, Manufacturer Part Number=PJ1-021-SMT-TR, Max Operating Temperature=85°C, Min Operating Temperature=-25°C, Package Quantity=500, Supplier Part Number 1=CP1-021PJCT-ND, Voltage Rating=24V, ComponentLink1Description=http://www.mouser.com/ds/2/670/pj1-021-smt-528091.pdf, ComponentLink1URL=http://www.mouser.com/ds/2/670/pj1-021-smt-528091.pdf, ComponentLink2Description=http://www.cui.com/product/resource/digikeypdf/pj1-021-smt.pdf, ComponentLink2URL=http://www.cui.com/product/resource/digikeypdf/pj1-021-smt.pdf, ComponentLink3Description=http://www.cui.com/Product/Resource/FuturePDF/PJ1-021-SMT.pdf, ComponentLink3URL=http://www.cui.com/Product/Resource/FuturePDF/PJ1-021-SMT.pdf, Connector Type=Jack, Contact Gender=Male, Contact Material=Brass, Contact Plating=Silver, Gender=Male, Housing Colour=Black, Housing Material=Thermoplastic, Lead Free="Lead Free", Mount="Surface Mount", Number of Conductors=2, Orientation=Horizontal, Packaging="Tape and Reel", Pricing 1="1=0.89, 10=0.783, 25=0.7364, 50=0.7058, 100=0.6752, 250=0.6138 (USD)", Shielding=Unshielded, Stock 1=15825, Supplier 1=Digi-Key, Termination=SMD/SMT
R2: library part RES_0805_5.23K, "Thick Film Resistors 5.23K OHM 1%", Case/Package=0805, Case Code (Metric)=2012, Manufacturer=Yageo, Manufacturer Part Number=RC0805FR-075K23L, Max Operating Temperature=155°C, Min Operating Temperature=-55°C, Power Rating=125mW, Resistance=5.23KR, Supplier Part Number 1=311-5.23KCRCT-ND, Temperature Coefficient=100ppm/°C, Tolerance=1%, Voltage Rating=150V, =5.23K, Case Code (Imperial)=0805, ComponentLink1Description=https://datasheet.ciiva.com/12577/rc0805-12577289.pdf, ComponentLink1URL=https://datasheet.ciiva.com/12577/rc0805-12577289.pdf, Composition="Thick Film", Contact Plating=Tin,Matte, Depth=1.25mm, Height=0.5mm, Lead Free="Lead Free", Length=2mm, Military Standard=Not, Packaging="Tape and Reel", Pricing 1="1=0.1, 10=0.022, 100=0.0088, 1000=0.004, 2500=0.0034 (USD)", Radiation Hardening=No, Stock 1=101854, Supplier 1=Digi-Key, Termination=SMD/SMT, Voltage Rating (DC)=150V, Weight=0.000194oz, Width=1.25mm
R3: "RES SMD 1K OHM 1% 1/8W 0805", Case/Package=0805, Case Code (Metric)=2012, Manufacturer=Yageo, Manufacturer Part Number=RC0805FR-071KL, Max Operating Temperature=155°C, Max Power Dissipation=125mW, Min Operating Temperature=-55°C, Package Quantity=1, Resistance=1KR, Supplier Part Number 1=311-1.00KCRCT-ND, Temperature Coefficient=100ppm/°C, Tolerance=1%, Voltage Rating=150V, =1K, Case Code (Imperial)=0805, ComponentLink1Description=https://datasheet.ciiva.com/2456/pyu-r-int-thick-7-2456976.pdf, ComponentLink1URL=https://datasheet.ciiva.com/2456/pyu-r-int-thick-7-2456976.pdf, ComponentLink2Description=https://datasheet.ciiva.com/2456/pyu-r-int-thick-7-2456977.pdf, ComponentLink2URL=https://datasheet.ciiva.com/2456/pyu-r-int-thick-7-2456977.pdf, ComponentLink3Description=https://datasheet.ciiva.com/11819/0900766b8106beab-11819814.pdf, ComponentLink3URL=https://datasheet.ciiva.com/11819/0900766b8106beab-11819814.pdf, ComponentLink4Description=https://datasheet.ciiva.com/7941/1686128-7941719.pdf, ComponentLink4URL=https://datasheet.ciiva.com/7941/1686128-7941719.pdf, ComponentLink5Description=https://datasheet.ciiva.com/16850/rc0805-16850409.pdf, ComponentLink5URL=https://datasheet.ciiva.com/16850/rc0805-16850409.pdf, ComponentLink6Description=https://datasheet.ciiva.com/46385/444164-46385020.pdf, ComponentLink6URL=https://datasheet.ciiva.com/46385/444164-46385020.pdf, ComponentLink7Description=https://datasheet.ciiva.com/2456/pyu-r-int-thick-7-2456975.pdf, ComponentLink7URL=https://datasheet.ciiva.com/2456/pyu-r-int-thick-7-2456975.pdf, Composition="Thick Film", Depth=1.25mm, Height=0.024inch, Lead Free="Lead Free", Length=0.079inch, Military Standard=Not, Number of Pins=2, Number of Terminations=2, Packaging="Tape and Reel", Power Rating=125mW, Pricing 1="1=0.1, 10=0.022, 100=0.0088, 1000=0.004, 2500=0.0034 (USD)", REACH SVHC=Unknown, Stock 1=6122451, Supplier 1=Digi-Key, Termination=SMD/SMT, Voltage Rating (DC)=150V, Width=0.049inch
R4: "RESISTOR, THICK FILM, 23.2KOHM, 125mW, ± 1%", Case/Package=0805, Case Code (Metric)=2012, Manufacturer="Panasonic ECG", Manufacturer Part Number=ERJ-6ENF2322V, Max Operating Temperature=155°C, Max Power Dissipation=125mW, Min Operating Temperature=-55°C, Package Quantity=1, Resistance=23.2KR, Supplier Part Number 1=P23.2KCCT-ND, Temperature Coefficient=100ppm/°C, Tolerance=1%, Voltage Rating=150V, =23.2K, Case Code (Imperial)=0805, ComponentLink1Description=https://datasheet.ciiva.com/16766/70260748-16766008.pdf, ComponentLink1URL=https://datasheet.ciiva.com/16766/70260748-16766008.pdf, ComponentLink2Description=https://datasheet.ciiva.com/16770/70260748-16770232.pdf, ComponentLink2URL=https://datasheet.ciiva.com/16770/70260748-16770232.pdf, ComponentLink3Description=https://datasheet.ciiva.com/24026/aoa0000ce2-24026235.pdf, ComponentLink3URL=https://datasheet.ciiva.com/24026/aoa0000ce2-24026235.pdf, ComponentLink4Description=https://datasheet.ciiva.com/15829/aoa0000ce2-15829836.pdf, ComponentLink4URL=https://datasheet.ciiva.com/15829/aoa0000ce2-15829836.pdf, ComponentLink5Description=https://datasheet.ciiva.com/30086/aoa0000ce2-30086557.pdf, ComponentLink5URL=https://datasheet.ciiva.com/30086/aoa0000ce2-30086557.pdf, ComponentLink6Description=https://datasheet.ciiva.com/28548/1694929-28548334.pdf, ComponentLink6URL=https://datasheet.ciiva.com/28548/1694929-28548334.pdf, ComponentLink7Description=https://datasheet.ciiva.com/7870/aoa0000ce2-7870831.pdf, ComponentLink7URL=https://datasheet.ciiva.com/7870/aoa0000ce2-7870831.pdf, Composition="Thick Film", Contact Plating=Tin, Depth=1.25mm, Height=0.6mm, Lead Free="Lead Free", Length=2mm, Military Standard=Not, Mount="Surface Mount", Number of Terminations=2, Packaging="Tape and Reel", Power Rating=125mW, Pricing 1="1=0.1, 10=0.041, 100=0.0167, 1000=0.0075, 2500=0.0065 (USD)", REACH SVHC=Unknown, Stock 1=76814, Supplier 1=Digi-Key, Termination=Solder, Voltage Rating (DC)=150V, Width=0.049inch
R5: "Res Thick Film 0805 100K Ohm 1% 0.125W(1/8W) ±100ppm/C Molded SMD Automotive Punched T/R", Case/Package=0805, Case Code (Metric)=2012, Manufacturer="Panasonic ECG", Manufacturer Part Number=ERJ-6ENF1003V, Max Operating Temperature=155°C, Max Power Dissipation=125mW, Min Operating Temperature=-55°C, Package Quantity=1, Resistance=100KR, Supplier Part Number 1=P100KCCT-ND, Temperature Coefficient=100ppm/°C, Tolerance=1%, Voltage Rating=150V, =100K, Case Code (Imperial)=0805, ComponentLink1Description=https://datasheet.ciiva.com/11821/0900766b80f80784-11821507.pdf, ComponentLink1URL=https://datasheet.ciiva.com/11821/0900766b80f80784-11821507.pdf, ComponentLink2Description=https://datasheet.ciiva.com/22723/426256-22723909.pdf, ComponentLink2URL=https://datasheet.ciiva.com/22723/426256-22723909.pdf, ComponentLink3Description=https://datasheet.ciiva.com/46419/1678782-46419877.pdf, ComponentLink3URL=https://datasheet.ciiva.com/46419/1678782-46419877.pdf, ComponentLink4Description=https://datasheet.ciiva.com/27055/1988989-27055734.pdf, ComponentLink4URL=https://datasheet.ciiva.com/27055/1988989-27055734.pdf, ComponentLink5Description=https://datasheet.ciiva.com/16449/aoa0000ce2-16449480.pdf, ComponentLink5URL=https://datasheet.ciiva.com/16449/aoa0000ce2-16449480.pdf, ComponentLink6Description=https://datasheet.ciiva.com/17208/aoa0000ce2-17208153.pdf, ComponentLink6URL=https://datasheet.ciiva.com/17208/aoa0000ce2-17208153.pdf, ComponentLink7Description=https://datasheet.ciiva.com/22667/1678782-22667897.pdf, ComponentLink7URL=https://datasheet.ciiva.com/22667/1678782-22667897.pdf, ComponentLink8Description=https://datasheet.ciiva.com/24023/aoa0000ce2-24023497.pdf, ComponentLink8URL=https://datasheet.ciiva.com/24023/aoa0000ce2-24023497.pdf, ComponentLink9Description=https://datasheet.ciiva.com/7830/426256-7830746.pdf, ComponentLink9URL=https://datasheet.ciiva.com/7830/426256-7830746.pdf, ComponentLink10Description=https://datasheet.ciiva.com/30257/aoa0000ce2-30257690.pdf, ComponentLink10URL=https://datasheet.ciiva.com/30257/aoa0000ce2-30257690.pdf, ComponentLink11Description=https://datasheet.ciiva.com/7830/426256-7830988.pdf, ComponentLink11URL=https://datasheet.ciiva.com/7830/426256-7830988.pdf, ComponentLink12Description=https://datasheet.ciiva.com/16776/70260748-16776892.pdf, ComponentLink12URL=https://datasheet.ciiva.com/16776/70260748-16776892.pdf, ComponentLink13Description=https://datasheet.ciiva.com/16788/70260748-16788734.pdf, ComponentLink13URL=https://datasheet.ciiva.com/16788/70260748-16788734.pdf, ComponentLink14Description=https://datasheet.ciiva.com/48531/aoa0000ce2-48531486.pdf, ComponentLink14URL=https://datasheet.ciiva.com/48531/aoa0000ce2-48531486.pdf, Composition="Thick Film", Contact Plating=Tin, Depth=1.25mm, Height=0.6mm, Lead Free="Lead Free", Length=2mm, Military Standard=Not, Mount="Surface Mount", Number of Pins=2, Number of Terminations=2, Packaging="Tape and Reel", Power Rating=125mW, Pricing 1="1=0.1, 10=0.041, 100=0.0167, 1000=0.0075, 2500=0.0065 (USD)", Radiation Hardening=No, REACH SVHC="No SVHC", Stock 1=219769, Supplier 1=Digi-Key, Termination=SMD/SMT, Voltage Rating (DC)=150V, Width=0.049inch
R6: "RES SMD 11.8K OHM 1% 1/8W 0805", Case/Package=0805, Case Code (Metric)=2012, Manufacturer=Yageo, Manufacturer Part Number=RC0805FR-0711K8L, Max Operating Temperature=155°C, Max Power Dissipation=125mW, Min Operating Temperature=-55°C, Package Quantity=1, Resistance=11.8KR, Supplier Part Number 1=311-11.8KCRCT-ND, Temperature Coefficient=100ppm/°C, Tolerance=1%, Voltage Rating=150V, =11.8K, Case Code (Imperial)=0805, ComponentLink1Description=https://datasheet.ciiva.com/15189/getdatasheetpartid-498796-15189893.pdf, ComponentLink1URL=https://datasheet.ciiva.com/15189/getdatasheetpartid-498796-15189893.pdf, ComponentLink2Description=https://datasheet.ciiva.com/2509/pyu-r-int-thick-7-2509453.pdf, ComponentLink2URL=https://datasheet.ciiva.com/2509/pyu-r-int-thick-7-2509453.pdf, ComponentLink3Description=https://datasheet.ciiva.com/2509/pyu-r-int-thick-7-2509454.pdf, ComponentLink3URL=https://datasheet.ciiva.com/2509/pyu-r-int-thick-7-2509454.pdf, ComponentLink4Description=https://datasheet.ciiva.com/2509/pyu-r-int-thick-7-2509455.pdf, ComponentLink4URL=https://datasheet.ciiva.com/2509/pyu-r-int-thick-7-2509455.pdf, Composition="Thick Film", Contact Plating=Tin,Lead,Matte, Depth=1.25mm, Height=0.024inch, Lead Free="Lead Free", Length=2mm, Military Standard=Not, Number of Terminations=2, Packaging="Tape and Reel", Power Rating=125mW, Pricing 1="1=0.1, 10=0.022, 100=0.0088, 1000=0.004, 2500=0.0034 (USD)", Radiation Hardening=No, Stock 1=69614, Supplier 1=Digi-Key, Termination=SMD/SMT, Voltage Rating (DC)=150V, Width=0.049inch
R7 R8 R9 R10 R11: "RES, THICK FILM, 10K, 5%, 0.125W, 0805", Case/Package=0805, Case Code (Metric)=2012, Manufacturer=Yageo, Manufacturer Part Number=RC0805JR-0710KL, Max Operating Temperature=155°C, Min Operating Temperature=-55°C, Power Rating=125mW, Resistance=10K, Supplier Part Number 1=311-10KARCT-ND, Temperature Coefficient=100ppm/°C, Tolerance=5%, Voltage Rating=150V, Case Code (Imperial)=0805, ComponentLink1Description=https://datasheet.ciiva.com/7983/444164-7983765.pdf, ComponentLink1URL=https://datasheet.ciiva.com/7983/444164-7983765.pdf, ComponentLink2Description=https://datasheet.ciiva.com/7941/444164-7941870.pdf, ComponentLink2URL=https://datasheet.ciiva.com/7941/444164-7941870.pdf, ComponentLink3Description=https://datasheet.ciiva.com/7941/444164-7941871.pdf, ComponentLink3URL=https://datasheet.ciiva.com/7941/444164-7941871.pdf, Composition="Thick Film", Contact Plating=Tin,Matte, Depth=1.25mm, Height=0.5mm, Lead Free="Lead Free", Length=2mm, Military Standard=Not, Packaging="Tape and Reel", Pricing 1="1=0.1, 10=0.019, 100=0.0076, 1000=0.0034, 2500=0.003 (USD)", Radiation Hardening=No, REACH SVHC=Unknown, Stock 1=1285290, Supplier 1=Digi-Key, Termination=SMD/SMT, Width=1.25mm
ROT1: "Encoders 15mm SHAFT w/SWITCH", Manufacturer=Bourns, Manufacturer Part Number=PEC11R-4015F-S0024, Max Operating Temperature=70°C, Min Operating Temperature=-30°C, Package Quantity=75, Supplier Part Number 1=PEC11R-4015F-S0024-ND, Built in Switch=Yes, ComponentLink1Description=https://datasheet.ciiva.com/29349/pec11r-29349519.pdf, ComponentLink1URL=https://datasheet.ciiva.com/29349/pec11r-29349519.pdf, Detent=No, Encoder Type=Mechanical, Height=13.4mm, Hole Diameter=1.8mm, Length=21.5mm, Mount="Through Hole,Panel,PCB", Number of Channels=2, Number of Pins=5, Orientation=Vertical, Output Type=Quadrature,Incremental, Packaging=Bulk, Pricing 1="1=1.68, 10=1.566, 25=1.4792, 50=1.305, 100=1.073, 250=1.044, 500=0.986, 1000=0.928, 5000=0.812 (USD)", Pulses per Revolution=24, Radiation Hardening=No, REACH SVHC="No SVHC", Stock 1=2755, Supplier 1=Digi-Key, Termination="PC Pin", Width=12.5mm
SPKR1: "4 Ohm Magnetic Speaker 2W 20Hz ~ 20kHz Top Rectangular 93dB", Colour=Green, Current=18A, Current Rating=16A, Flammability Rating="UL94 V-0", Manufacturer=CUI, Max Power Dissipation=2.5W, Max Supply Voltage=250V, Package Quantity=250, Power Rating=2W, Supplier Part Number 1=102-3547-ND, Voltage=300V, Voltage Rating (DC)=320V, Approvals=UL, ComponentLink1Description=https://datasheet.ciiva.com/824/combiconcompact5-0mmseries-824222.pdf, ComponentLink1URL=https://datasheet.ciiva.com/824/combiconcompact5-0mmseries-824222.pdf, ComponentLink2Description=https://datasheet.ciiva.com/15169/getdatasheetpartid-177903-15169663.pdf, ComponentLink2URL=https://datasheet.ciiva.com/15169/getdatasheetpartid-177903-15169663.pdf, ComponentLink3Description=https://datasheet.ciiva.com/16047/1935161-16047247.pdf, ComponentLink3URL=https://datasheet.ciiva.com/16047/1935161-16047247.pdf, Connector Type=Screw, Depth=9mm, Height=6.1mm, Housing Colour=Green, Housing Material=Polyamide, Impedance=4R, Insulation Material=Nylon, Lead Free="Lead Free", Length=27mm, Manufacturer Part Number=CDS-27204-L100, Material=Nylon, Max Current Rating=16A, Mount="Through Hole", Number of Circuits=2, Number of Contacts=2, Number of Levels=1, Number of Poles=2, Number of Positions=2, Number of Positions Per Level=2, Number of Rows=1, Orientation=Straight, Packaging=Bulk, Pitch=5mm, Pricing 1="1=3.55, 10=3.179, 25=2.8052, 50=2.5246, 100=2.4871, 250=2.3842, 500=2.2908, 1000=2.244 (USD)", Pricing 2="1=0.38, 10=0.368, 50=0.352, 100=0.3424, 250=0.32, 500=0.2944, 1000=0.272 (USD)", Radiation Hardening=No, Shape=Rectangular, Stock 1=445, Stock 2=16172, Supplier 1=Digi-Key, Supplier 2=Digi-Key, Supplier Part Number 2=277-1667-ND, Termination="Wire Leads", Voltage Rating=250V, Weight=0.067021oz, Width=20mm, Wire/Cable Gauge=14AWG, Wire Gauge (Max)=26AWG, Wire Gauge (Min)=12AWG
SW1: "...It's a button!", link=https://www.sparkfun.com/products/11996
U1: "TRANSLATOR, VOLTAGE, 8BIT, 20TSSOP", Logic Case Style=TSSOP, Manufacturer="Texas Instruments", Manufacturer Part Number=TXS0108EPWR, Operating Temperature Max=85°C, Operating Temperature Min=-40°C, Output Current=620µA, Supplier Part Number 1=296-23011-1-ND, Supply Voltage Max=5.5V, Supply Voltage Min=1.2V, ComponentLink1Description=https://datasheet.ciiva.com/14287/txs0108e-14287280.pdf, ComponentLink1URL=https://datasheet.ciiva.com/14287/txs0108e-14287280.pdf, ComponentLink2Description=https://datasheet.ciiva.com/4834/sces642b-127094-4834401.pdf, ComponentLink2URL=https://datasheet.ciiva.com/4834/sces642b-127094-4834401.pdf, ComponentLink3Description=https://datasheet.ciiva.com/30509/txs0108epwr-30509699.pdf, ComponentLink3URL=https://datasheet.ciiva.com/30509/txs0108epwr-30509699.pdf, ComponentLink4Description=https://datasheet.ciiva.com/1899/txs0108e-1899604.pdf, ComponentLink4URL=https://datasheet.ciiva.com/1899/txs0108e-1899604.pdf, ComponentLink5Description=https://datasheet.ciiva.com/15096/getdatasheetpartid-322119-15096276.pdf, ComponentLink5URL=https://datasheet.ciiva.com/15096/getdatasheetpartid-322119-15096276.pdf, ComponentLink6Description=https://datasheet.ciiva.com/1899/txs0108e-1899605.pdf, ComponentLink6URL=https://datasheet.ciiva.com/1899/txs0108e-1899605.pdf, ComponentLink7Description=https://datasheet.ciiva.com/28653/1714661-28653429.pdf, ComponentLink7URL=https://datasheet.ciiva.com/28653/1714661-28653429.pdf, ComponentLink8Description=https://datasheet.ciiva.com/1899/txs0108e-1899606.pdf, ComponentLink8URL=https://datasheet.ciiva.com/1899/txs0108e-1899606.pdf, ComponentLink9Description=https://datasheet.ciiva.com/1508/1815244-1508732.pdf, ComponentLink9URL=https://datasheet.ciiva.com/1508/1815244-1508732.pdf, ComponentLink10Description=https://datasheet.ciiva.com/14287/txs0108e-14287532.pdf, ComponentLink10URL=https://datasheet.ciiva.com/14287/txs0108e-14287532.pdf, ComponentLink11Description=https://datasheet.ciiva.com/26039/txs0108e-26039599.pdf, ComponentLink11URL=https://datasheet.ciiva.com/26039/txs0108e-26039599.pdf, Logic Type="Voltage Level Translator", MSL="MSL 1 - Unlimited", No. of Inputs=8, No. of Pins=20, Packaging="Cut Tape", Pricing 1="1=1.7, 10=1.523, 100=1.2242, 500=1.0058, 1000=0.8334 (USD)", Propagation Delay=4.8ns, Stock 1=41812, Supplier 1=Digi-Key, SVHC="No SVHC (16-Jun-2014)"
U2: "POWER MODULE, TO-PMOD-7, FULL REEL", Manufacturer="Texas Instruments", Manufacturer Part Number=LMZ12003TZ-ADJ/NOPB, Max Input Voltage=20V, Max Operating Temperature=125°C, Max Output Current=3A, Max Output Voltage=6V, Max Power Dissipation=18W, Min Input Voltage=4.5V, Min Operating Temperature=-40°C, Min Output Voltage=800mV, Package Quantity=1, Quiescent Current=1mA, Supplier Part Number 1=LMZ12003TZ-ADJ/NOPBCT-ND, Switching Frequency=1MHz, ComponentLink1Description=https://datasheet.ciiva.com/48695/001207013-da-01-en-ic-buc-lmz12003tz-adj-nopb-to-pmod-7-tid-48695238.pdf, ComponentLink1URL=https://datasheet.ciiva.com/48695/001207013-da-01-en-ic-buc-lmz12003tz-adj-nopb-to-pmod-7-tid-48695238.pdf, Efficiency=92%, Height=0.18inch, Lead Free="Lead Free", Length=0.4inch, Mount="Surface Mount", Number of Outputs=1, Number of Pins=8, Output Current=3A, Output Voltage=6V, Packaging="Tape and Reel", Pricing 1="1=9.05, 5=8.986, 10=8.918, 25=8.7804, 50=8.5062, 100=7.683 (USD)", REACH SVHC="No SVHC", Stock 1=0, Supplier 1=Digi-Key, Voltage - Output 1=6V, Width=0.54inch
U3 U4 U5 U6 U7 U8 U9 U10 U11 U12 U13 U14 U15 U16 U17 U18 U19 U20 U21 U22: library part APA102, "SPI LED", link=https://www.adafruit.com/product/2343
U23: "IC BUFFER SCHMIT TRIG SOT23-5", Case/Package=SOT-23, High Level Output Current=-32mA, Low Level Output Current=32mA, Manufacturer="Texas Instruments", Manufacturer Part Number=SN74LVC1G17DBVR, Max Operating Temperature=125°C, Max Supply Voltage=5.5V, Min Operating Temperature=-40°C, Min Supply Voltage=1.65V, Package Quantity=3000, Quiescent Current=1.5uA, Supplier Part Number 1=296-11933-1-ND, ComponentLink1Description=https://datasheet.ciiva.com/34301/756684-34301476.pdf, ComponentLink1URL=https://datasheet.ciiva.com/34301/756684-34301476.pdf, ComponentLink2Description=https://datasheet.ciiva.com/1833/sn74lvc1g17-1833621.pdf, ComponentLink2URL=https://datasheet.ciiva.com/1833/sn74lvc1g17-1833621.pdf, ComponentLink3Description=https://datasheet.ciiva.com/7744/1811088-7744197.pdf, ComponentLink3URL=https://datasheet.ciiva.com/7744/1811088-7744197.pdf, ComponentLink4Description=https://datasheet.ciiva.com/28594/1772570-28594805.pdf, ComponentLink4URL=https://datasheet.ciiva.com/28594/1772570-28594805.pdf, ComponentLink5Description=https://datasheet.ciiva.com/1833/sn74lvc1g17-1833622.pdf, ComponentLink5URL=https://datasheet.ciiva.com/1833/sn74lvc1g17-1833622.pdf, ComponentLink6Description=https://datasheet.ciiva.com/1833/sn74lvc1g17-1833623.pdf, ComponentLink6URL=https://datasheet.ciiva.com/1833/sn74lvc1g17-1833623.pdf, ComponentLink7Description=https://datasheet.ciiva.com/15094/getdatasheetpartid-189714-15094971.pdf, ComponentLink7URL=https://datasheet.ciiva.com/15094/getdatasheetpartid-189714-15094971.pdf, ComponentLink8Description=https://datasheet.ciiva.com/48702/001073974-da-01-en-ic-buffer-s-sn74lvc1g17dbvr-sot-23-5-tid-48702678.pdf, ComponentLink8URL=https://datasheet.ciiva.com/48702/001073974-da-01-en-ic-buffer-s-sn74lvc1g17dbvr-sot-23-5-tid-48702678.pdf, Contact Plating=Tin,Matte, Height=1.15mm, Lead Free="Lead Free", Length=2.9mm, Logic Function="Schmitt Trigger,Buffer", Mount="Surface Mount", Number of Bits=1, Number of Bits per Element=1, Number of Channels=1, Number of Elements=1, Number of Gates=1, Number of Input Lines=1, Number of Inputs=1, Number of Output Lines=1, Number of Outputs=1, Number of Pins=5, Packaging="Tape and Reel", Polarity=Non-Inverting, Pricing 1="1=0.43, 10=0.32, 100=0.1996, 500=0.1366, 1000=0.1051 (USD)", Propagation Delay=5ns, Radiation Hardening=No, REACH SVHC="No SVHC", Schmitt Trigger Input=Yes, Stock 1=68193, Supplier 1=Digi-Key, Termination=SMD/SMT, Turn-On Delay Time=11ns, Width=1.6mm
U24: library part NC7SZ157, "FAIRCHILD SEMICONDUCTOR         NC7SZ157P6X             Logic Type:Multiplexer", Case/Package=SC, High Level Output Current=32mA, Manufacturer="Fairchild Semiconductor", Manufacturer Part Number=NC7SZ157P6X, Max Operating Temperature=85°C, Max Power Dissipation=180mW, Max Supply Voltage=5.5V, Min Operating Temperature=-40°C, Package Quantity=3000, Supplier Part Number 1=NC7SZ157P6XCT-ND, ComponentLink1Description=https://datasheet.ciiva.com/27050/874365-27050578.pdf, ComponentLink1URL=https://datasheet.ciiva.com/27050/874365-27050578.pdf, ComponentLink2Description=https://datasheet.ciiva.com/1888/nc7sz157-1888131.pdf, ComponentLink2URL=https://datasheet.ciiva.com/1888/nc7sz157-1888131.pdf, ComponentLink3Description=https://datasheet.ciiva.com/1888/nc7sz157-1888132.pdf, ComponentLink3URL=https://datasheet.ciiva.com/1888/nc7sz157-1888132.pdf, ComponentLink4Description=https://datasheet.ciiva.com/1509/680929-1509109.pdf, ComponentLink4URL=https://datasheet.ciiva.com/1509/680929-1509109.pdf, ComponentLink5Description=https://datasheet.ciiva.com/1888/nc7sz157-1888133.pdf, ComponentLink5URL=https://datasheet.ciiva.com/1888/nc7sz157-1888133.pdf, ComponentLink6Description=https://datasheet.ciiva.com/1509/680929-1509110.pdf, ComponentLink6URL=https://datasheet.ciiva.com/1509/680929-1509110.pdf, ComponentLink7Description=https://datasheet.ciiva.com/17012/nc7sz157-17012088.pdf, ComponentLink7URL=https://datasheet.ciiva.com/17012/nc7sz157-17012088.pdf, ComponentLink8Description=https://datasheet.ciiva.com/3305/nc7sz157-3305418.pdf, ComponentLink8URL=https://datasheet.ciiva.com/3305/nc7sz157-3305418.pdf, ComponentLink9Description=https://datasheet.ciiva.com/3305/nc7sz157-3305419.pdf, ComponentLink9URL=https://datasheet.ciiva.com/3305/nc7sz157-3305419.pdf, ComponentLink10Description=https://datasheet.ciiva.com/15087/getdatasheetpartid-138973-15087148.pdf, ComponentLink10URL=https://datasheet.ciiva.com/15087/getdatasheetpartid-138973-15087148.pdf, Contact Plating=Tin,Matte, Height=1mm, Independent Circuits=1, Lead Free="Lead Free", Length=2mm, Logic Function=Multiplexer,Inverting,Mux, Low Level Output Current=32mA, Mount="Surface Mount", Number of Channels=1, Number of Circuits=1, Number of Input Lines=2, Number of Inputs=2, Number of Output Lines=1, Number of Outputs=1, Number of Pins=6, Number of Terminals=6, Packaging="Tape and Reel", Power Dissipation=180mW, Pricing 1="1=0.47, 10=0.349, 100=0.1978, 500=0.131, 1000=0.1004 (USD)", Propagation Delay=3.7ns, Radiation Hardening=No, REACH SVHC="No SVHC", Stock 1=29001, Supplier 1=Digi-Key, Supply Type=Single, Throw Configuration=DPST, Weight=0.028g, Width=1.25mm

## Via types
v1: diameter 0.889, hole 0.508, Top Layer to Bottom Layer, 36 vias
v2: diameter 0.711, hole 0.381, Top Layer to Bottom Layer, 19 vias
v3: diameter 1.27, hole 0.711, Top Layer to Bottom Layer, 12 vias
v4: diameter 0.864, hole 0.406, Top Layer to Bottom Layer, 2 vias
v5: diameter 0.864, hole 0.381, Top Layer to Bottom Layer, 1 vias

## Nets (pads, with @x,y where several pads share a name; then routed paths per layer and width w, separated by ;. In a path a pad name is that pad's centre, name@x,y a point inside that pad or via, vN(x,y) a via of type N, cw(c..) or ccw(c..) an arc to the next point about the centre after c; other vN are vias at no path point)
5V: C2.2 C5.2 C6.2 C7.2 C11.2 C12.2 C13.2 C14.2 C15.2 C16.2 C17.2 C18.2 C19.2 C20.2 C21.2 C22.2 C23.2 C24.2 C25.2 C26.2 C27.2 C28.2 C29.2 C30.2 C31.2 LCD1.1 LCD1.9 R2.2 R7.2 R8.2 R9.2 U1.19 U2.7 U3.4 U4.4 U5.4 U6.4 U7.4 U8.4 U9.4 U10.4 U11.4 U12.4 U13.4 U14.4 U15.4 U16.4 U17.4 U18.4 U19.4 U20.4 U21.4 U22.4 U23.5 U24.5 | length 98.2
  Bottom Layer w0.254: U1.19 v5(116.5,130.6) ; v2(120.8,133.2) U24.5
  Bottom Layer w0.381: C28.2 93.8,119.7 v1(95.3,121.2) 96,121.9 C29.2 ; C30.2 111.6,123 111.8,122.8 v1@111.8,122.9 ; C12.2 136.679,122.121 v1(136.679,121.2) ; C13.2 v1@152,122.7 ; v1(151.1,91.5) 151.15,91.55 C16.2 ; v1(151.7,103.7) C15.2 ; v1@151.9,122.8 v1@152,122.7 ; v1(152.1,122.7) v1@152,122.7 ; C14.2 163.15,115.35 v1(163.2,115.3)
  Bottom Layer w0.508: C24.2 94.9,69.6 v3(95.8,70.5) ; C25.2 v1(96.6,81.8) ; C26.2 v1(96.05,93.65) v1@96.1,93.7 ; C27.2 101.5,105.4 v3(101.9,105.8) ; v3(97.9,64.5) 98.8,63.6 C23.2 ; C22.2 110.85,65.35 v1(110.9,65.4) ; v5(116.5,130.6) C2.2@118,130.6 ; v1(122.8,65.5) 122.85,65.45 C21.2 ; C11.2 v1(126.3,127.7) ; v1(134.9,65.9) 134.95,65.85 C20.2 ; U23.5 144.25,52.8 v3(149.1,52.8) 149.1,47.55 R7.2 ; C19.2 146.85,64.85 v1(146.9,64.9) ; v1(151,67.6) 151.05,67.65 C18.2 ; v1(151.4,79.8) 151.45,79.75 C17.2 ; v1(152.8,53.1) 154.25,51.65 R8.2 ; R9.2 v1(164.2,53.4)
  Bottom Layer w0.635: U2.7 84.81,110.51 87.15,112.85 C5.2 87.15,119.8 R2.2
  Bottom Layer w1.016: C6.2 88.7,110.5 C7.2
  Bottom Layer w1.27: 87.15,112.85 88.3,111.7 C6.2
  other v1: 112.027,122.7
  other v3: 111.1,101.4 107.6,101.5 104.527,103.427 111.1,104.3 111,107
12V_BATTIN: C8.2 C9.2 J2.36 J2.38 PWR1.1 R4.2 R5.1 U2.1 | length 99
  Bottom Layer w0.635: R5.1 77,109.195 U2.1
  Bottom Layer w1.27: R5.1 76.95,114.95 R4.2 77.05,117.5 C9.2 77,120.05 C8.2 77,124.2 79.6,126.8 86.2,126.8 PWR1.1 ; PWR1.1@90.1,130.915 99.285,140.1 128.7,140.1 132.4,136.4 J2.36 J2.38
  Bottom Layer w1.905: PWR1.1 PWR1.1@90.1,130.915
CSS2: C10.2 U2.5 | length 5.7
  Bottom Layer w0.635: U2.5 82.27,111.449 82.714,111.892 82.714,111.914 83.75,112.95 C10.2
DB_LCD_DAT: J2.31 U1.5 | length 43
  Bottom Layer w0.254: U1.5 103.95,132.55 103.1,131.7 103.1,127.9 105.2,125.8 112.7,125.8 114.6,123.9 123.4,123.9 125.4,121.9 125.4,116.8 126,116.2 127.7,116.2 128.4,115.5 J2.31
DB_LCD_RST: J2.26 U1.6 | length 34.5
  Bottom Layer w0.254: U1.6 103.5,133.2 102.5,132.2 102.5,127.5 104.7,125.3 112.3,125.3 114.2,123.4 118.9,123.4 122.4,119.9 J2.26
DB_PB: J2.33 U1.3 | length 39.7
  Bottom Layer w0.254: U1.3 105.05,131.25 104.5,130.7 104.5,128.9 106.6,126.8 113.5,126.8 115.2,125.1 124.6,125.1 129.4,120.3 129.4,116.7 130.4,115.7 J2.33
DB_ROT_A: J2.32 U1.4 | length 36.4
  Bottom Layer w0.254: U1.4 104.5,131.9 103.8,131.2 103.8,128.4 105.9,126.3 113.1,126.3 115,124.4 124.2,124.4 128.4,120.2 J2.32
DB_ROT_B: J2.34 U1.1 | length 29.1